# EAGLE board brakelight_V4 (EAGLE 9.5.2)
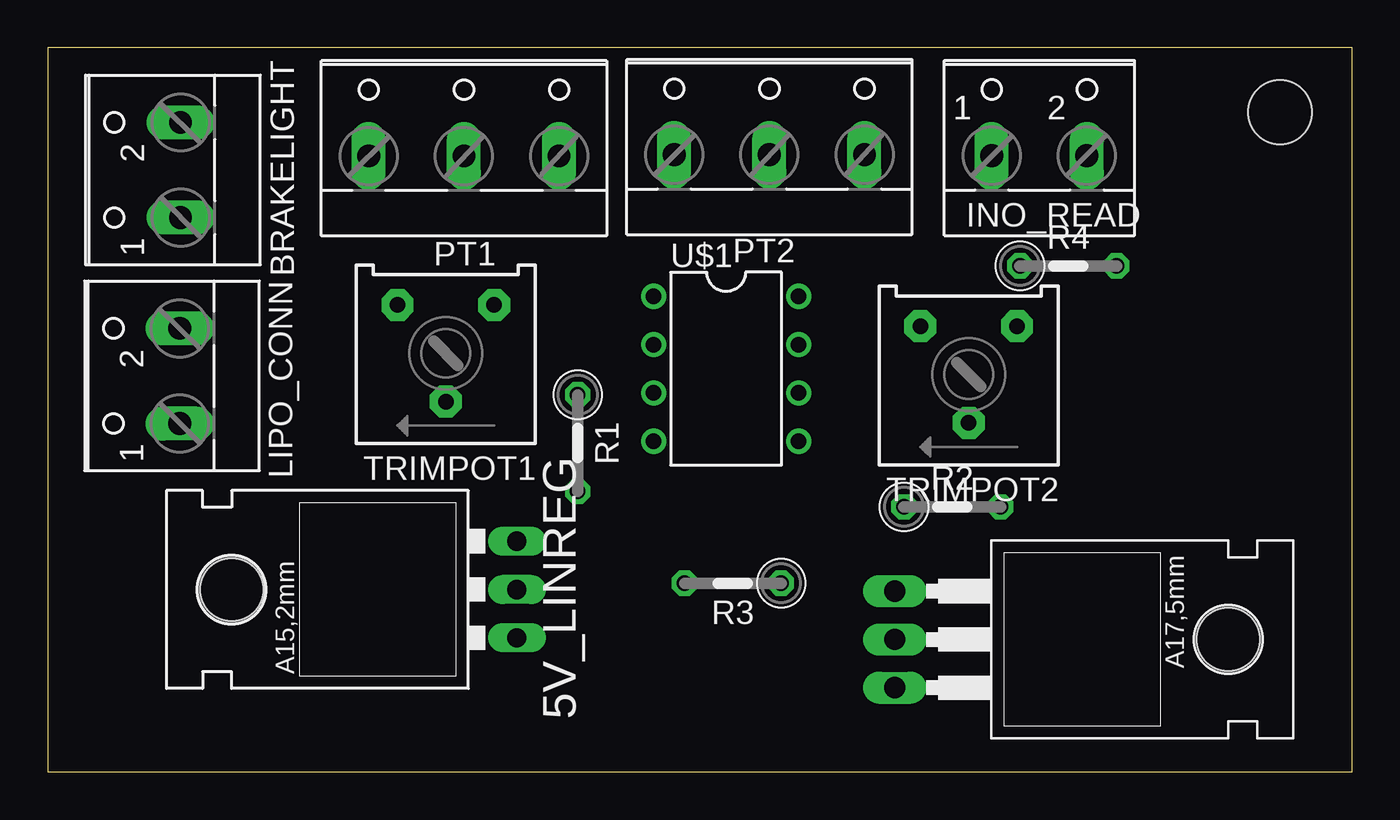
[diagram p0: board, top side]
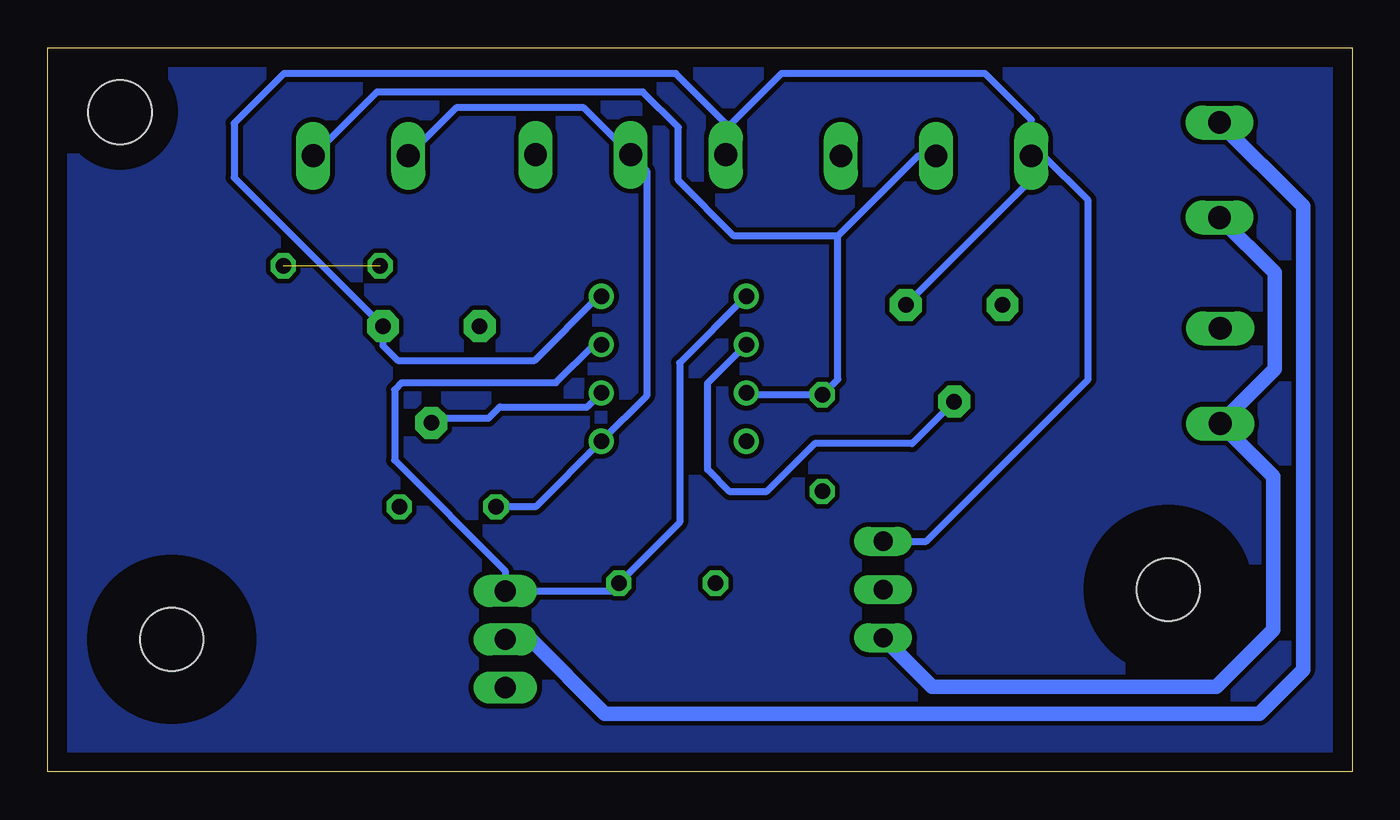
[diagram p1: board, bottom side, seen from below]

Size 68.58 x 38.1 mm. Coordinates in mm from the lower left corner, seen from the top.
Outline: 0,0 68.58,0 68.58,38.1 0,38.1 0,0
Copper layers (1*16): Top 0.035mm / dielectric 1.5mm / Bottom 0.035mm
Design rules "default": minimum track width 6mil, minimum drill 0.35mm, track to track 6mil, track to pad 6mil, pad to pad 6mil, via to via 6mil, smd to smd 6mil, copper to edge 40mil, drill to drill 6mil, minimum pad ring 10mil, minimum via ring 8mil, stop-mask expansion 4mil, vias tented up to drill 0mil, thermal gap 10mil
Holes 3.35 mm at 64.77,34.7
bRestrict: area 62,31.9 to 67.6,37.5
vRestrict: area 62,31.9 to 67.6,37.5

## Footprints (pad centres in the part's own frame; a part is rotated, then mirrored left to right if it is on the bottom)
78XXL = drill 1.016 long: GND 0,-3.81; IN -2.54,-3.81; OUT 2.54,-3.81 | hole 3.302: 0,11.176
W237-102 = drill 1.194 long: 1 -2.5,-1.27; 2 2.5,-1.27
W237-103 = drill 1.194 long: 1 -5,-1.29; 2 0,-1.29; 3 5,-1.29
TO220 = drill 1.118 long: 1 -2.54,-6.35; 2 0,-6.35; 3 2.54,-6.35 | hole 3.302: 0,11.176
0207/5V = drill 0.813 octagon: 1 -2.54,0; 2 2.54,0
3386Y = drill 0.813 pad 1.676 octagon: 1 -2.54,-2.54; 2 0,2.54; 3 2.54,-2.54
DIL08 = drill 0.813 pad 1.27: 1 -3.81,-3.81; 2 -1.27,-3.81; 3 1.27,-3.81; 4 3.81,-3.81; 5 3.81,3.81; 6 1.27,3.81; 7 -1.27,3.81; 8 -3.81,3.81

## Placement (x,y rotation side)
5V_LINREG  [78XXL]  20.85,9.6 90 top
BRAKELIGHT  [W237-102]  5.72,31.66 90 top
INO_READ  [W237-102]  52.12,33.68 0 top
LIPO_CONN  [W237-102]  5.68,20.83 90 top
PT1  [W237-103]  21.88,33.69 0 top
PT2  [W237-103]  37.93,33.75 0 top
Q2  30N06L  [TO220]  50.88,6.98 270 top
R1  [0207/5V]  27.86,17.3 270 top
R2  [0207/5V]  47.55,13.94 0 top
R3  [0207/5V]  36.02,9.93 180 top
R4  [0207/5V]  53.64,26.62 0 top
TRIMPOT1  [3386Y]  20.93,22.02 180 top
TRIMPOT2  [3386Y]  48.41,20.9 180 top
U$1  TLC2252  [DIL08]  35.66,21.21 270 top

## Library data of the parts
5V_LINREG = v-reg
BRAKELIGHT INO_READ LIPO_CONN = con-wago-500; MPN: 237-102; OC_FARNELL: unknown; OC_NEWARK: 70K9898
PT1 PT2 = con-wago-500; MPN: 237-103; OC_FARNELL: unknown; OC_NEWARK: 18M7116
Q2 = transistor-fet; SPICEPREFIX: Q
R1-R4 = 0ohmresistor; SPICEPREFIX: R
TRIMPOT1 TRIMPOT2 = bourns
U$1 = GTOR

## Nets
5V: 5V_LINREG.OUT PT1.1 PT2.1 TRIMPOT1.1 TRIMPOT2.1 U$1.8
GND: 5V_LINREG.GND LIPO_CONN.2 PT1.3 PT2.3 Q2.3 R1.2 R2.2 R4.1 R4.2 TRIMPOT1.3 TRIMPOT2.3 U$1.4
N$1: R3.2
N$2: BRAKELIGHT.2 Q2.2
N$3: Q2.1 R3.1 U$1.1 U$1.7
PT1: INO_READ.2 PT1.2 R1.1 U$1.3
PT2: INO_READ.1 PT2.2 R2.1 U$1.5
VCC: 5V_LINREG.IN BRAKELIGHT.1 LIPO_CONN.1
VREF1: TRIMPOT1.2 U$1.2
VREF2: TRIMPOT2.2 U$1.6

## Tracks (layer width: path | path; a pad name or v marks a point on that pad's centre or on a via)
5V
  Bottom 0.381: PT1.1 16.88,34.3 19.3,36.73 30.01,36.73 32.93,33.81 PT2.1 32.93,34.1 35.56,36.73 56.16,36.73 58.78,34.11 58.78,31.27 TRIMPOT2.1 50.95,22.43 50.16,21.64 42.98,21.64 39.6,25.02 U$1.8 | TRIMPOT1.1 16.88,31.15 PT1.1 | 5V_LINREG.OUT 22.41,12.14 13.89,20.65 13.89,30.07 16.22,32.4 PT1.1
GND  (1 unrouted)
N$2
  Bottom 0.762: BRAKELIGHT.2 2.59,29.76 2.59,5.38 4.9,3.07 39.29,3.07 43.2,6.98 Q2.2
N$3
  Bottom 0.381: U$1.7 39.85,22.48 41.86,20.47 49.96,20.47 50.34,20.09 50.34,16.4 44.53,10.58 Q2.1 38.97,9.52 R3.1 35.36,13.13 35.36,21.51 U$1.1
N$4
  pour Bottom (isolate 0.254): 0,38.28 68.61,38.28 68.61,-0.43 0,-0.43
PT1
  Bottom 0.381: PT1.2 22.84,32.4 27.05,28.19 | 27.05,28.19 32.51,28.19 35.43,31.11 35.43,33.91 37.29,35.76 51.27,35.76 INO_READ.2 | U$1.3 31.75,19.84 R1.1 27.05,20.65 27.05,28.19
PT2
  Bottom 0.381: INO_READ.1 47.11,34.92 40.4,34.92 PT2.2 37.09,31.62 37.09,19.78 U$1.5 42.93,13.95 R2.1
VCC
  Bottom 0.762: BRAKELIGHT.1 4.09,26.26 4.09,21.19 LIPO_CONN.1 4.17,15.55 4.17,7.47 7.16,4.47 22.07,4.47 5V_LINREG.IN
VREF1
  Bottom 0.381: TRIMPOT1.2 23.14,17.27 28.27,17.27 30.81,14.73 32.72,14.73 33.88,15.9 33.88,20.45 U$1.2
VREF2
  Bottom 0.381: TRIMPOT2.2 48.18,18.59 45.41,18.59 44.81,19.2 40.21,19.2 U$1.6